# Altium PCB PCB_Segment_Shift_Reg.PcbDoc
Units mm, origin at the board's own origin, x right, y up, seen from the top; angles counter-clockwise.
Board outline 104.27 x 49.91 mm, 2 copper layers (Top Layer, Bottom Layer); 33 components, 36 nets, 99 pads, 4 vias.
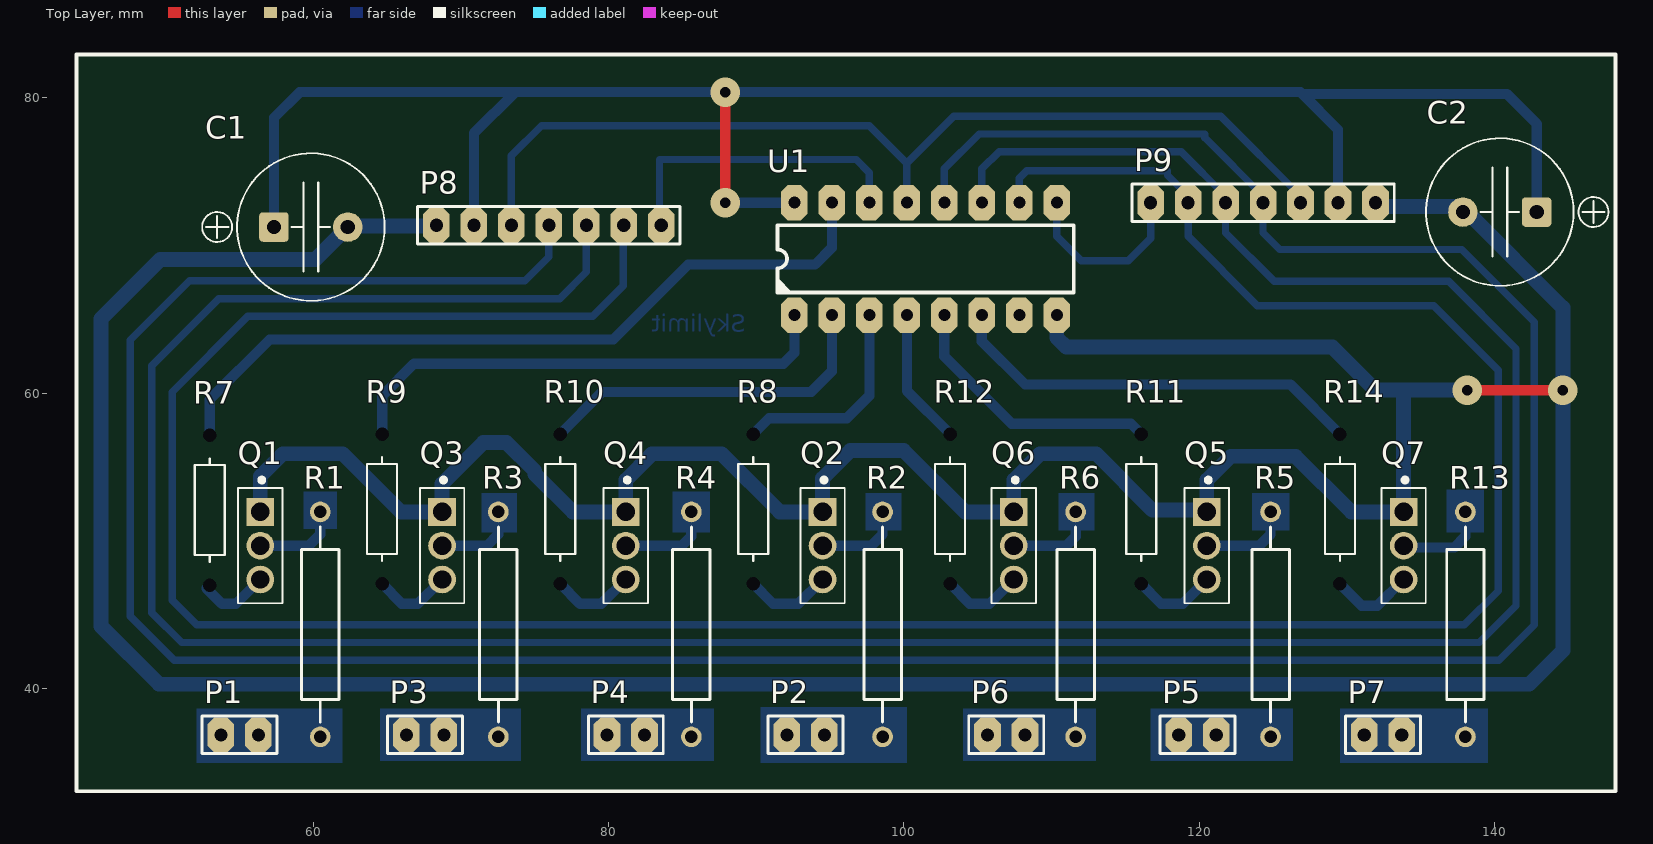
[diagram p0: Top Layer view]
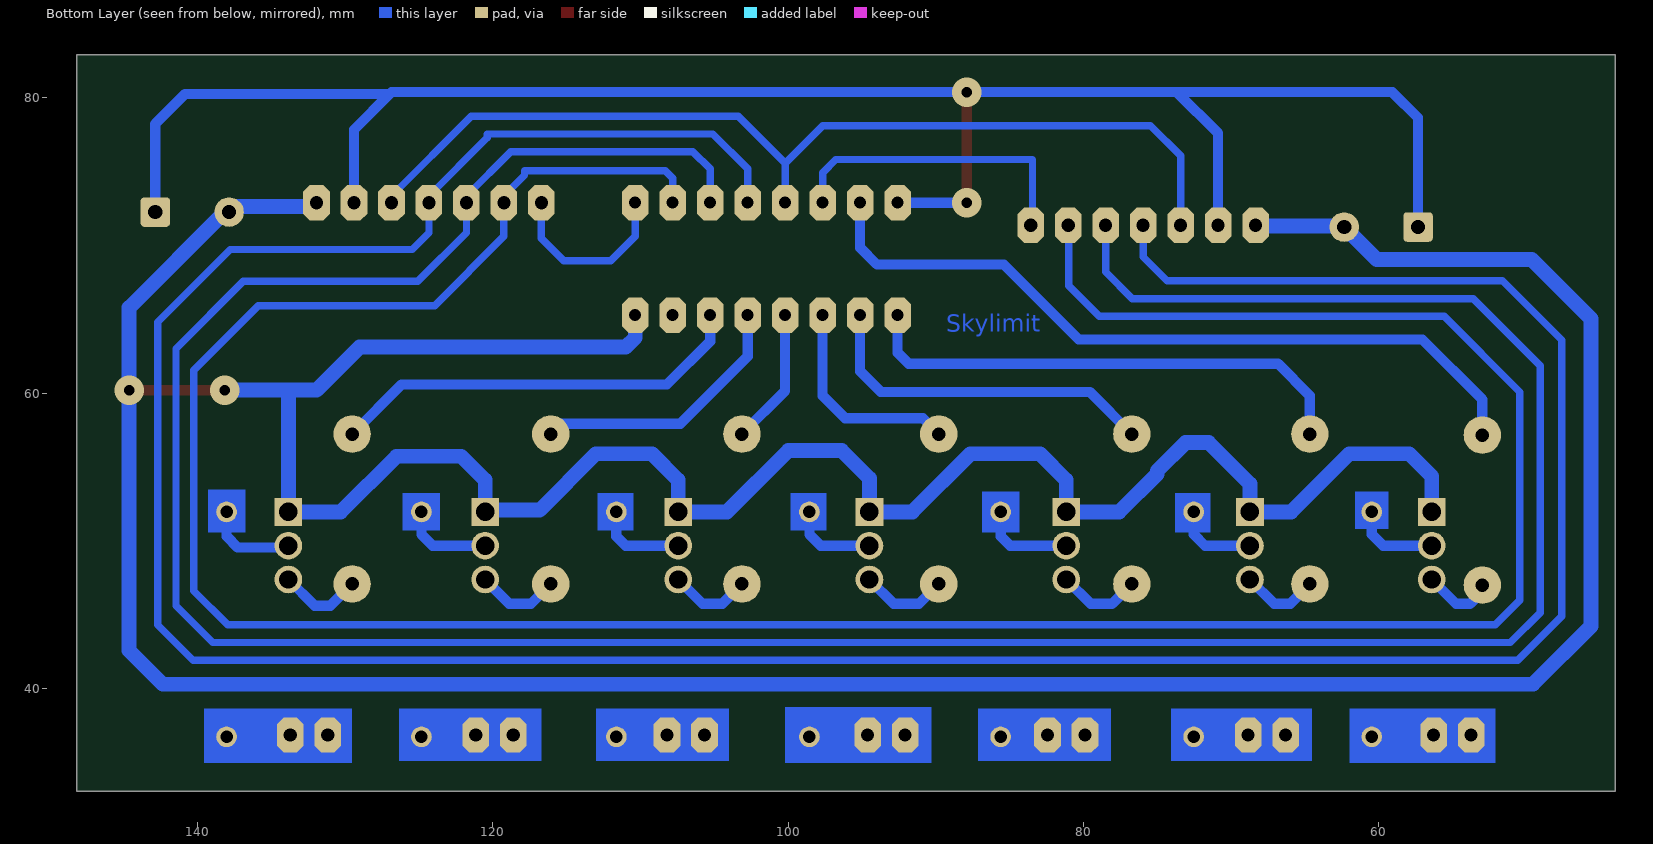
[diagram p1: Bottom Layer view, seen from below]

## Layer stack, top to bottom
Top Solder: solder mask 0.0102, Solder Resist, Dk 3.5
Top Layer: signal copper 0.0356
Dielectric 1: dielectric 0.32, FR-4, Dk 4.8
Bottom Layer: signal copper 0.0356
Bottom Solder: solder mask 0.0102, Solder Resist, Dk 3.5

## Board outline
43.942,33.02 43.942,82.931 148.209,82.931 148.209,33.02

## Design rules (kind name [scope] priority, off if disabled: settings)
Clearance [All] p1: gap=0.7 ignorepadtopadclearanceinfootprint=FALSE
PolygonConnect [All] p1: connectstyle=Relief reliefconductorwidth=0.254 reliefentries=4 polygonreliefangle="90 Angle" airgapwidth=0.254
RoutingVias [All] p1: holewidth=0.711 width=1.27 viastyle="Through Hole" minholewidth=0.711 minwidth=1.27 maxholewidth=0.711 maxwidth=1.27
SolderMaskExpansion [All] p1: expansion=0.102
Width [All] p1: maxlimit=1 minlimit=0.5 preferedwidth=0.7
30 further rules are at their usual default settings.

## Components (designator, comment, footprint, x,y, rotation, side; value= is the part's Value field where it differs from the comment)
C1 "100 μF" CAPE10.0MM_Rad_10x14mm 59.817,71.247 r0 top value="100 µF"
C2 "100 μF" CAPE10.0MM_Rad_10x14mm 140.375,72.263 r180 top value="100 µF"
P1 "Header 2" HDR1X2 56.261,36.83 r180 top
P2 "Header 2" HDR1X2 94.615,36.83 r180 top
P3 "Header 2" HDR1X2 68.834,36.83 r180 top
P4 "Header 2" HDR1X2 82.423,36.83 r180 top
P5 "Header 2" HDR1X2 121.158,36.83 r180 top
P6 "Header 2" HDR1X2 108.204,36.83 r180 top
P7 "Header 2" HDR1X2 133.731,36.83 r180 top
P8 "Header 7" HDR1X7 83.566,71.374 r180 top
P9 "Header 7" HDR1X7 116.713,72.898 r0 top
Q1 "BD135" "*TO229P780X300X2000-3 - duplicate" 56.388,51.943 r270 top
Q2 "BD135" "*TO229P780X300X2000-3 - duplicate" 94.488,51.943 r270 top
Q3 "BD135" "*TO229P780X300X2000-3 - duplicate" 68.707,51.943 r270 top
Q4 "BD135" "*TO229P780X300X2000-3 - duplicate" 81.153,51.943 r270 top
Q5 "BD135" "*TO229P780X300X2000-3 - duplicate" 120.523,51.943 r270 top
Q6 "BD135" "*TO229P780X300X2000-3 - duplicate" 107.442,51.943 r270 top
Q7 "BD135" "*TO229P780X300X2000-3 - duplicate" 133.858,51.943 r270 top
R1 "Metal Film" AXIAL-0.6 60.452,44.323 r90 top value=10R
R2 "Metal Film" AXIAL-0.6 98.552,44.323 r90 top value=10R
R3 "Metal Film" AXIAL-0.6 72.517,44.323 r90 top value=10R
R4 "Metal Film" AXIAL-0.6 85.598,44.323 r90 top value=10R
R5 "Metal Film" AXIAL-0.6 124.841,44.323 r90 top value=10R
R6 "Metal Film" AXIAL-0.6 111.633,44.323 r90 top value=10R
R7 "Carbon Film" RESTH_AXIAL-0.4 52.959,52.07 r270 top value=1K
R8 "Carbon Film" RESTH_AXIAL-0.4 89.789,52.141 r270 top value=1K
R9 "Carbon Film" RESTH_AXIAL-0.4 64.643,52.141 r270 top value=1K
R10 "Carbon Film" RESTH_AXIAL-0.4 76.708,52.141 r270 top value=1K
R11 "Carbon Film" RESTH_AXIAL-0.4 116.078,52.141 r270 top value=1K
R12 "Carbon Film" RESTH_AXIAL-0.4 103.124,52.141 r270 top value=1K
R13 "Metal Film" AXIAL-0.6 138.049,44.323 r90 top value=10R
R14 "Carbon Film" RESTH_AXIAL-0.4 129.54,52.141 r270 top value=1K
U1 "74HC595" DIP_300_16 101.473,69.088 r90 top

## Footprints (in the part's own frame and the unit in brackets; to place one, negate y for a bottom-side part, rotate by r counter-clockwise, add the part's x,y. Pads: shape width x height; smd on the part's side, far side on the other; paste and mask are expansions set on the pad)
"*TO229P780X300X2000-3 - duplicate" [mm]
  rect 1.875x1.875 hole 1.25: 1(0,0)
  round 1.875 hole 1.25: 2(2.29,0) 3(4.58,0)
  silkscreen extent -2.31,-1.5 6.19,1.5
AXIAL-0.6 [mm] "Axial Device, Thru-Hole; 2 Leads; 0.6 in Pin Spacing"
  round 1.4 hole 0.85: 1(-7.62,0) 2(7.62,0)
  silkscreen extent -6.6,-1.27 6.6,1.27
CAPE10.0MM_Rad_10x14mm [mm] "10mm Pitch Radial Capacitor 10x14mm DxH"
  round 0.5 on Mech15: 0(0,0)
  rrect25% 2x2 hole 0.965: 1(-2.5,0)
  round 2 hole 0.965: 2(2.5,0)
  silkscreen extent -7.36,-5 5,5, body extent -5.25,-5.24 5.21,5.24, height 13.99
DIP_300_16 [mm]
  oct 2.4x1.8 hole 0.813: 1(-3.81,8.89) 2(-3.81,6.35) 3(-3.81,3.81) 4(-3.81,1.27) 5(-3.81,-1.27) 6(-3.81,-3.81) 7(-3.81,-6.35) 8(-3.81,-8.89) 9(3.81,-8.89) 10(3.81,-6.35) 11(3.81,-3.81) 12(3.81,-1.27) 13(3.81,1.27) 14(3.81,3.81) 15(3.81,6.35) 16(3.81,8.89)
  silkscreen extent -2.29,-10.03 2.29,10.03, body extent -3.94,-11 3.93,11, height 5.15
HDR1X2 [mm] "Connector; Header; 2 Position"
  oct 1.8x2.4 hole 0.9: 1(0,0) 2(2.54,0)
  silkscreen extent -1.27,-1.27 3.81,1.27
HDR1X7 [mm] "Connector; Header; 7 Position"
  oct 1.8x2.4 hole 0.9: 1(0,0) 2(2.54,0) 3(5.08,0) 4(7.62,0) 5(10.16,0) 6(12.7,0) 7(15.24,0)
  silkscreen extent -1.27,-1.27 16.51,1.27
RESTH_AXIAL-0.4 [mil]
  round 0 / inner round 0 / far side round 100 hole 36 unplated: 1(-200,0) 2(200,0)
  silkscreen extent -138,-40 138,40, body extent -212,-50 212,50, height 102

## Part data
C1 C2: library part "Electrolitic Capacitor, Thru-Hole", "Electrolitic Capacitor, Thru-Hole", Contact=cynetik_group@hotmail.com, Created by="Zion Blue", Published="28 April 2014", Publisher="Cynetik Group"
P1 P2 P3 P4 P5 P6 P7: "Header, 2-Pin", LatestRevisionDate=17-Jul-2002, LatestRevisionNote="Re-released for DXP Platform.", Publisher="Altium Limited"
P8 P9: "Header, 7-Pin", LatestRevisionDate=17-Jul-2002, LatestRevisionNote="Re-released for DXP Platform.", Publisher="Altium Limited"
Q1 Q2 Q3 Q4 Q5 Q6 Q7: "Trans GP BJT NPN 45V 1.5A 3-Pin TO-126", Package="TO-126-3 NXP Semiconductors", Availability=Unavailable, MF="ON Semiconductor", MP=BD135, Price=None, SnapEDA_Link=https://www.snapeda.com/parts/BD135/ON%20Semiconductor/view-part/?ref=snap
R1 R2 R3 R4 R5 R6 R13: library part RES_10R_Axial_1W_5%, "Resistor THD 10 Ohm 1W 5% Metal Film", Manufacturer 1="Vishay/BC Components", Manufacturer Part Number 1=PR01000101009JR500, Package / Case="2.5x8.0mm DxL", Ratings=1W, Supplier Part Number 1=PPC10W-1CT-ND, Tolerance=±5%, SCDType=spec, Supplier 1=Digi-Key
R7 R8 R9 R10 R11 R12 R14: library part RES_1K_Axial_0.25W_5%, "Resistor THD Axial 1k Ohm 0.25W 5% Carbon Film", Manufacturer 1=Yageo, Manufacturer Part Number 1=CFR-25JB-1K0, Package / Case=Axial, Ratings=1/4W, Supplier Part Number 1=1.0KQBK-ND, Tolerance=±5%, SCDType=spec, Supplier 1=Digi-Key
U1: "74 Series"

## Via types
v1: diameter 2, hole 0.711, Top Layer to Bottom Layer, 4 vias

## Nets (pads, with @x,y where several pads share a name; then routed paths per layer and width w, separated by ;. In a path a pad name is that pad's centre, name@x,y a point inside that pad or via, vN(x,y) a via of type N, cw(c..) or ccw(c..) an arc to the next point about the centre after c; other vN are vias at no path point)
+5V: C1.1 C2.1 P8.6 P9.6 U1.16 | length 131.1
  Top Layer w0.7: v1(87.884,72.898) v1(87.884,80.391)
  Bottom Layer w0.7: C1.1 57.317,78.653 59.055,80.391 73.66,80.391 ; P8.6 70.866,77.597 73.66,80.391 ; v1(87.884,72.898) U1.16 ; 126.873,80.391 v1(87.884,80.391) 73.66,80.391 ; P9.6 129.413,77.851 127,80.264 140.843,80.264 142.875,78.232 C2.1
DS: P8.1 U1.14 | length 21.1
  Bottom Layer w0.5: P8.1 83.439,71.501 83.439,75.819 96.774,75.819 97.663,74.93 U1.14
GND: C1.2 C2.2 P8.7 P9.7 Q1.1 Q2.1 Q3.1 Q4.1 Q5.1 Q6.1 Q7.1 U1.8 | length 337.8
  Top Layer w0.7: v1(138.176,60.198) v1(144.653,60.198)
  Bottom Layer w1: Q1.1 56.388,54.356 57.912,55.88 61.976,55.88 65.913,51.943 Q3.1 68.707,53.848 71.501,56.642 73.071,56.642 74.987,54.726 74.987,54.514 77.558,51.943 Q4.1 81.153,54.102 82.931,55.88 87.637,55.88 91.574,51.943 Q2.1 94.488,54.229 96.357,56.098 99.985,56.098 104.14,51.943 Q6.1 107.442,54.102 109.22,55.88 113.03,55.88 116.84,52.07 120.396,52.07 Q5.1 120.523,54.102 122.138,55.717 126.528,55.717 130.302,51.943 Q7.1 133.858,60.198 ; P8.7 68.263,71.31 62.381,71.31 C1.2 60.117,69.047 58.668,69.047 55.966,69.047 49.616,69.047 45.598,65.029 45.598,44.191 49.53,40.259 142.367,40.259 144.653,42.545 v1(144.653,60.198) 144.653,65.786 138.176,72.263 C2.2 137.494,72.644 132.207,72.644 P9.7 ; U1.8 110.363,63.754 110.998,63.119 129.032,63.119 131.953,60.198 133.858,60.198 ; v1(138.176,60.198) 133.858,60.198
MR: P8.2 P9.2 U1.10 | length 199.9
  Bottom Layer w0.5: P8.2 80.981,71.329 80.981,67.265 78.913,65.197 55.545,65.197 50.419,60.071 50.419,45.954 52.08,44.293 137.973,44.293 140.269,46.589 140.269,61.534 135.89,65.913 123.952,65.913 119.253,70.612 P9.2 119.253,73.352 117.856,74.749 117.856,75.057 108.331,75.057 107.823,74.549 U1.10
NetP1_1: P1.1 P1.2 R1.1
NetP2_1: P2.1 P2.2 R2.1
NetP3_1: P3.1 P3.2 R3.1
NetP4_1: P4.1 P4.2 R4.1
NetP5_1: P5.1 P5.2 R5.1
NetP6_1: P6.1 P6.2 R6.1
NetP7_1: P7.1 P7.2 R13.1
NetQ1_2: Q1.2 R1.2 | length 5.9
  Bottom Layer w0.7: Q1.2 59.686,49.653 60.452,50.419 R1.2
NetQ1_3: Q1.3 R7.2 | length 4.8
  Bottom Layer w0.7: R7.2@52.741,46.772 53.792,45.72 54.745,45.72 Q1.3
NetQ2_2: Q2.2 R2.2 | length 5.9
  Bottom Layer w0.7: Q2.2 94.492,49.657 97.79,49.657 98.552,50.419 R2.2
NetQ2_3: Q2.3 R8.2 | length 5.9
  Bottom Layer w0.7: R8.2 91.13,45.72 92.845,45.72 Q2.3
NetQ3_2: Q3.2 R3.2 | length 5.7
  Bottom Layer w0.7: Q3.2 71.751,49.653 72.517,50.419 R3.2
NetQ3_3: Q3.3 R9.2 | length 5.3
  Bottom Layer w0.7: R9.2 65.984,45.72 67.064,45.72 Q3.3
NetQ4_2: Q4.2 R4.2 | length 6.4
  Bottom Layer w0.7: Q4.2 84.959,49.653 85.598,50.292 R4.2
NetQ4_3: Q4.3 R10.2 | length 5.7
  Bottom Layer w0.7: R10.2 78.049,45.72 79.502,45.72 81.145,47.363 Q4.3
NetQ5_2: Q5.2 R5.2 | length 6.2
  Bottom Layer w0.7: Q5.2 124.075,49.653 124.841,50.419 R5.2
NetQ5_3: Q5.3 R11.2 | length 5.7
  Bottom Layer w0.7: R11.2 117.419,45.72 118.897,45.72 120.523,47.346 Q5.3
NetQ6_2: Q6.2 R6.2 | length 6.1
  Bottom Layer w0.7: Q6.2 110.994,49.653 111.633,50.292 R6.2
NetQ6_3: Q6.3 R12.2 | length 5.6
  Bottom Layer w0.7: R12.2 104.465,45.72 105.799,45.72 Q6.3
NetQ7_2: Q7.2 R13.2 | length 6.2
  Bottom Layer w0.7: Q7.2 133.981,49.53 137.287,49.53 138.049,50.292 R13.2
NetQ7_3: Q7.3 R14.2 | length 5.7
  Bottom Layer w0.7: R14.2 131.008,45.593 132.08,45.593 133.85,47.363 Q7.3
NetR7_1: R7.1 U1.15 | length 51.9
  Bottom Layer w0.7: R7.1 52.959,59.563 57.023,63.627 80.297,63.627 85.377,68.707 93.98,68.707 95.123,69.85 U1.15
NetR8_1: R8.1 U1.3 | length 14.4
  Bottom Layer w0.7: R8.1 90.858,58.29 96.136,58.29 97.663,59.817 U1.3
NetR9_1: R9.1 U1.1 | length 34.3
  Bottom Layer w0.7: R9.1 64.643,59.817 66.802,61.976 91.821,61.976 92.583,62.738 U1.1
NetR10_1: R10.1 U1.2 | length 24
  Bottom Layer w0.7: R10.1 79.558,60.071 93.726,60.071 95.123,61.468 U1.2
NetR11_1: R11.1 U1.5 | length 18.3
  Bottom Layer w0.7: U1.5 102.743,62.484 107.315,57.912 115.387,57.912 R11.1
NetR12_1: R12.1 U1.4 | length 9.3
  Bottom Layer w0.7: U1.4 100.203,60.142 R12.1
NetR14_1: R14.1 U1.6 | length 28.6
  Bottom Layer w0.7: U1.6 105.283,63.5 108.204,60.579 126.182,60.579 R14.1
OE: P8.5 P9.5 U1.13 | length 66.7
  Bottom Layer w0.5: P8.5 73.406,76.073 75.441,78.108 97.66,78.108 100.203,75.565 ; U1.13 100.203,75.565 ; P9.5 126.873,73.352 121.476,78.748 103.386,78.748 100.203,75.565
Q7S: P9.1 U1.9 | length 12.4
  Bottom Layer w0.5: U1.9 110.363,70.612 112.014,68.961 115.189,68.961 116.713,70.485 P9.1
SH: P8.3 P9.3 U1.11 | length 209.7
  Bottom Layer w0.5: P8.3 78.486,68.199 76.684,66.397 53.57,66.397 49.031,61.858 49.031,45.122 51.06,43.093 138.978,43.093 141.469,45.584 141.469,63.011 136.916,67.564 125.095,67.564 121.793,70.866 P9.3 121.793,73.352 118.796,76.348 106.447,76.348 105.283,75.184 U1.11
ST: P8.4 P9.4 U1.12 | length 219.5
  Bottom Layer w0.5: P8.4 75.946,69.215 74.328,67.597 51.595,67.597 47.589,63.591 47.589,44.867 50.563,41.893 140.318,41.893 142.703,44.278 142.703,64.815 137.795,69.723 125.476,69.723 124.333,70.866 P9.4 124.333,73.352 120.396,77.289 120.396,77.548 105.107,77.548 102.743,75.184 U1.12
pads on no net: C1.0 C2.0 U1.7

## Other copper
Bottom Layer:
  rectangle net NetQ7_2: 136.779,50.546 139.319,53.467
  rectangle net NetQ5_2: 123.571,50.673 126.111,53.213
  rectangle net NetQ6_2: 110.49,50.673 112.903,53.213
  rectangle net NetQ2_2: 97.409,50.673 99.822,53.213
  rectangle net NetQ4_2: 84.328,50.546 86.868,53.34
  rectangle net NetQ3_2: 71.374,50.546 73.787,53.213
  rectangle net NetQ1_2: 59.309,50.8 61.595,53.34
  rectangle net NetP7_1: 129.54,34.925 139.573,38.608
  rectangle net NetP5_1: 116.713,35.052 126.365,38.608
  rectangle net NetP6_1: 104.013,35.052 113.03,38.608
  rectangle net NetP2_1: 90.297,34.925 100.203,38.735
  rectangle net NetP4_1: 78.105,35.052 87.122,38.608
  rectangle net NetP3_1: 64.516,35.052 74.041,38.608
  rectangle net NetP1_1: 52.07,34.925 61.976,38.608
  text "Skylimit" at 89.281,63.754 h2

## Silkscreen, mask and mechanical layers (free items; w line width, h text height)
Top Overlay:
  the board outline again, w0.254